# Altium PCB PongBoy.PcbDoc
Units mm, origin at the board's own origin, x right, y up, seen from the top; angles counter-clockwise.
Board outline 100 x 80 mm, 2 copper layers (Top Layer, Bottom Layer), stack 1.57 mm thick; 34 components, 34 nets, 146 pads, 18 vias.
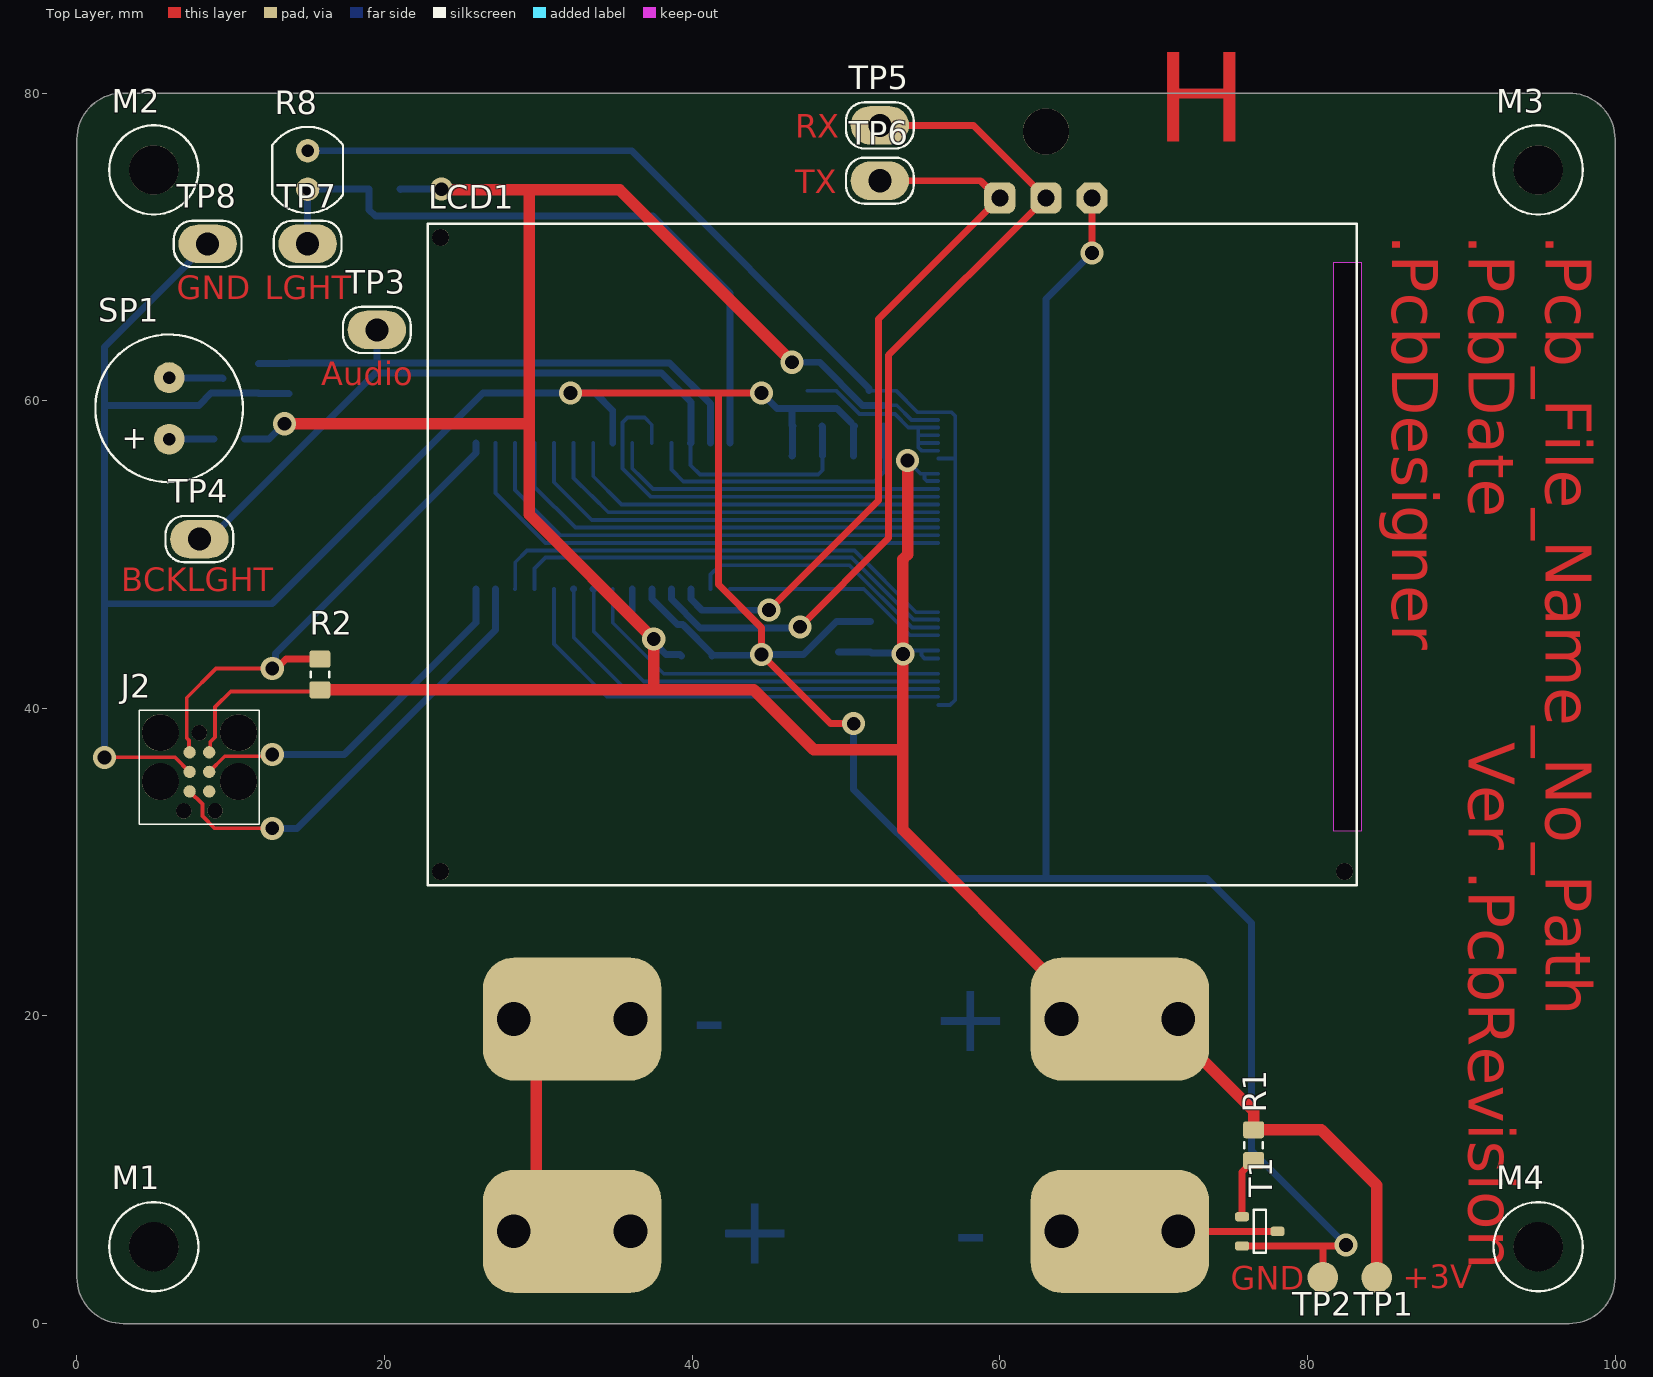
[diagram p0: Top Layer view]
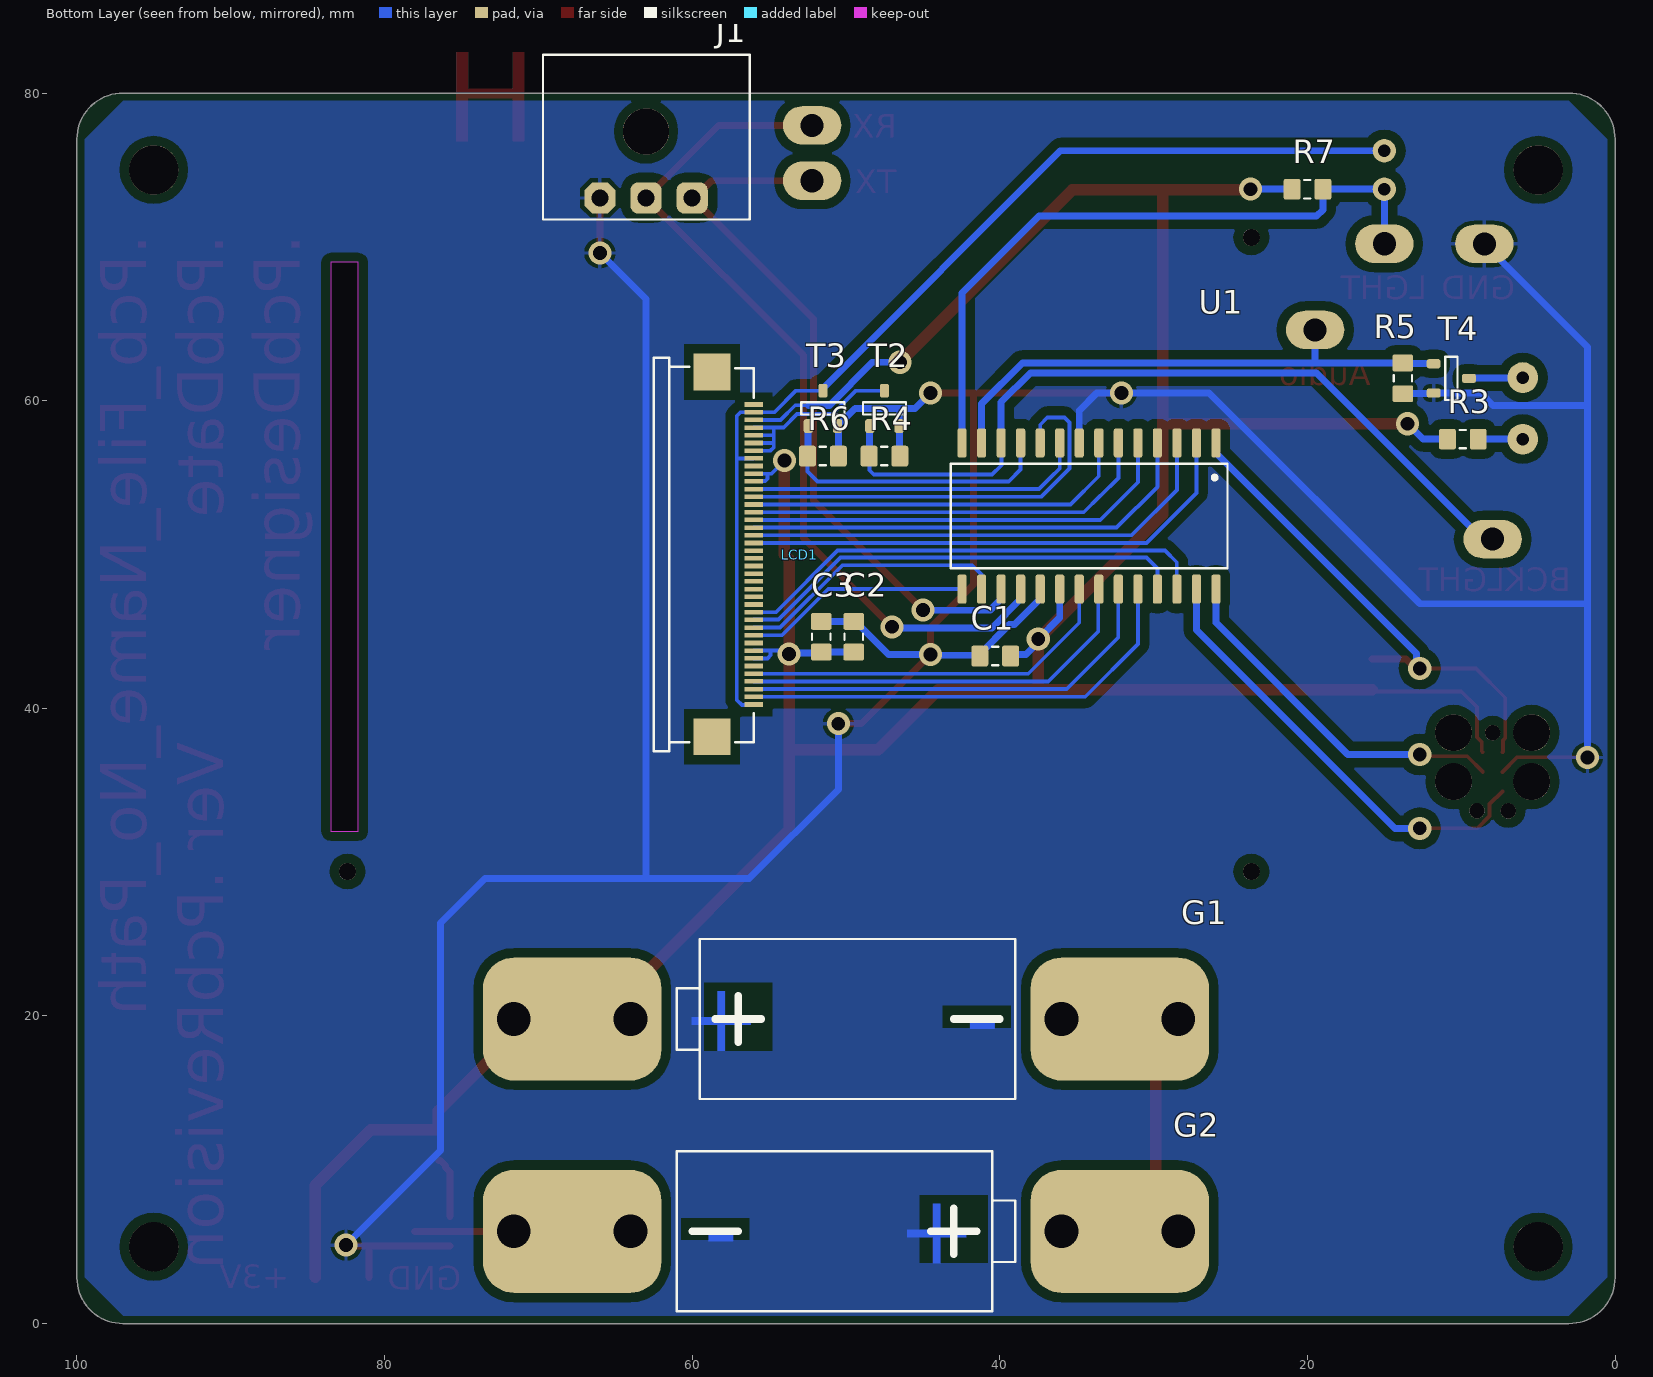
[diagram p1: Bottom Layer view, seen from below]

## Layer stack, top to bottom
Top Layer: signal copper 0.035
Dielectric 1: core 1.5, FR-4, Dk 4.2
Bottom Layer: signal copper 0.035

## Board outline
0,3 0,77 cw(c3,77) 3,80 97,80 cw(c97,77) 100,77 100,2.995 cw(c97.005,2.995) 97.005,0 3,0 cw(c3,3)
cut-out: 81.7,69 83.5,69 83.5,32 81.7,32

## Design rules (kind name [scope] priority, off if disabled: settings)
AcuteAngle [All] p1: minimum=9.00000000000000E+0001 checktracksonly=TRUE
AssemblyTestPointUsage [All] p1 off:
AssemblyTestpoint [All] p1 off: testpointundercomponent=TRUE minsize=1.016 maxsize=2.54 preferedsize=1.524 minholesize=0 maxholesize=1.016 preferedholesize=0.813 testpointgrid=0.025 usegrid=TRUE gridtolerance=0 allowsidetop=TRUE allowsidebottom=TRUE
BoardOutlineClearance [All] p1 off: gap=0.25 ignorepadtopadclearanceinfootprint=FALSE
Clearance [All] p1: gap=0.2 ignorepadtopadclearanceinfootprint=FALSE except(0.6: Arc-Fill Arc-Poly Arc-Region Track-Fill Track-Poly Track-Region SMDPad-Fill SMDPad-Poly SMDPad-Region THPad-Fill THPad-Poly THPad-Region Via-Fill Via-Poly Via-Region Fill-Fill Fill-Poly Fill-Region Poly-Poly Poly-Region Region-Region)
ComponentClearance [All] p1 off: gap=0.25 collisioncheckmode=3 verticalgap=0.25 showdistances=FALSE
DiffPairsRouting [All] p1 off: maxlimit=0.254 minlimit=0.254 mostfreqgap=0.254 toplayer_minwidth=0.381 toplayer_maxwidth=0.381 toplayer_prefwidth=0.381 bottomlayer_minwidth=0.381 bottomlayer_maxwidth=0.381 bottomlayer_prefwidth=0.381 maxuncoupledlength=12.7
FabricationTestPointUsage [All] p1 off: valid=0 allowmultiple=FALSE
FabricationTestpoint [All] p1 off: side=3 testpointundercomponent=TRUE minsize=1.016 maxsize=2.54 preferedsize=1.524 minholesize=0 maxholesize=1.016 preferedholesize=0.813 testpointgrid=0.025 allowsidetop=TRUE allowsidebottom=TRUE usegrid=TRUE gridtolerance=0
FanoutControl Fanout_BGA [IsBGA] p1 off: bgadir=Out bgaviamode=Centered fanoutstyle=Auto fanoutdirection=Alternating viagrid=0.025 // Fanout_BGA (Default Rule)
FanoutControl Fanout_LCC [IsLCC] p2 off: bgadir=Out bgaviamode=Centered fanoutstyle=Auto fanoutdirection=Alternating viagrid=0.025 // Fanout_LCC (Default Rule)
FanoutControl Fanout_SOIC [IsSOIC] p3 off: bgadir=Out bgaviamode=Centered fanoutstyle=Auto fanoutdirection=Alternating viagrid=0.025 // Fanout_SOIC (Default Rule)
FanoutControl Fanout_Small [(CompPinCount < 5)] p4 off: bgadir=Out bgaviamode=Centered fanoutstyle=Auto fanoutdirection=OutThenIn viagrid=0.025 // Fanout_Small (Default Rule)
FanoutControl Fanout_Default [All] p5 off: bgadir=Out bgaviamode=Centered fanoutstyle=Auto fanoutdirection=Alternating viagrid=0.025 // Fanout_Default (Default Rule)
Height [All] p1 off: minheight=0 maxheight=25.4 prefheight=12.7
HoleSize [All] p1 off: absolutevalues=TRUE maxlimit=3 minlimit=0.15 maxpercent=80.000 minpercent=20.000
HoleToHoleClearance [All] p1 off: gap=0.25 allowstackedmicrovias=TRUE
LayerPairs [All] p1 off: enforce=TRUE
MinimumAnnularRing [All] p1 off: minimumring=0.35
MinimumSolderMaskSliver [All] p1 off: minsoldermaskwidth=0
PasteMaskExpansion [All] p1 off: expansion=0
PlaneClearance [All] p1: clearance=0.25
PlaneConnect [All] p1 off: planeconnectstyle=Relief reliefexpansion=0.5 reliefentries=4 reliefconductorwidth=0.25 reliefairgap=0.25
PolygonConnect [All] p1: connectstyle=Relief reliefconductorwidth=0.25 reliefentries=4 polygonreliefangle="90 Angle" airgapwidth=0.25
RoutingCorners [All] p1 off: cornerstyle=45-Degree minsetback=2.5 maxsetback=2.5
RoutingLayers [All] p1 off: top layer_v5=TRUE bottom layer_v5=TRUE
RoutingPriority [All] p1 off: routingpriority=0
RoutingTopology [All] p1 off: topology=Shortest
RoutingVias [All] p1: holewidth=0.9 width=1.5 viastyle="Through Hole" minholewidth=0.9 minwidth=1.5 maxholewidth=0.9 maxwidth=1.5
SilkToBoardRegionClearance [All] p1 off:
SilkToSilkClearance [All] p1 off: silktosilkclearance=0
SilkToSolderMaskClearance [IsPad] p1 off: minsilkscreentomaskgap=0 clearancetoexposedcopper=TRUE
SolderMaskExpansion [All] p1 off: expansion=0
Width [All] p1: maxlimit=4 minlimit=0.25 preferedwidth=0.45
4 further rules are at their usual default settings.

## Components (designator, comment, footprint, x,y, rotation, side; value= is the part's Value field where it differs from the comment)
C1 "100n" "CAPACITOR 2012 REFLOW" 40.3,43.4 r180 bottom
C2 "100n" "CAPACITOR 2012 REFLOW" 49.5,44.65 r270 bottom
C3 "100n" "CAPACITOR 2012 REFLOW" 51.604,44.65 r270 bottom
G1 "AAA Battery Holder" "1.5V Cell AAA/LR03" 50,19.8 r180 bottom
G2 "AAA Battery Holder" "1.5V Cell AAA/LR03" 50,6 r0 bottom locked
J1 "MOLEX 43650-0300" "MOLEX 43650-0300" 63,73.18 r0 bottom
J2 "TAG CONNECT TC2030-MCP-FP" "TAG CONNECT TC2030-MCP-FP" 7.965,35.87 r270 top
LCD1 "LCD-NHD-2.4-240320SF" LCD-NHD-2.4-240320SF 56,50 r90 top locked
M1 "M3x20" "Screw Hex Socket M3X5 Unconnected" 5,5 r0 top locked
M2 "M3x20" "Screw Hex Socket M3X5 Unconnected" 5,75 r0 top locked
M3 "M3x20" "Screw Hex Socket M3X5 Unconnected" 95,75 r0 top locked
M4 "M3x20" "Screw Hex Socket M3X5 Unconnected" 95,5 r0 top locked
R1 "10k" "RESISTOR 2012 REFLOW" 76.5,11.6 r90 top
R2 "10k" "RESISTOR 2012 REFLOW" 15.8,42.2 r270 top
R3 "100" "RESISTOR 2012 REFLOW" 9.9,57.5 r0 bottom
R4 "10k" "RESISTOR 2012 REFLOW" 47.5,56.396 r0 bottom
R5 "10k" "RESISTOR 2012 REFLOW" 13.8,61.45 r90 bottom
R6 "10k" "RESISTOR 2012 REFLOW" 51.5,56.396 r0 bottom
R7 "TBD" "RESISTOR 2012 REFLOW" 20,73.75 r0 bottom
R8 "*" "LDR VT900" 15,75 r90 top
SP1 "PUI Audio AT-0927-TT-3-R" "Speaker PUI Audio AT-0927-TT-3-R" 6,59.5 r180 top
T1 "PMV13XNEAR" "SOT23 P0.95 C1.6x3.0 H1.3" 76.9,6 r0 top
T2 "PMV13XNEAR" "SOT23 P0.95 C1.6x3.0 H1.3" 47.5,59.5 r90 bottom
T3 "PMV13XNEAR" "SOT23 P0.95 C1.6x3.0 H1.3" 51.5,59.5 r90 bottom
T4 "PMV13XNEAR" "SOT23 P0.95 C1.6x3.0 H1.3" 10.65,61.45 r180 bottom
TP1 "*" "Pad D2.0" 84.5,3 r0 top
TP2 "*" "Pad D2.0" 81,3 r90 top
TP3 "*" "Test Point Vogt 1016L.68M" 19.5,64.6 r0 top
TP4 "*" "Test Point Vogt 1016L.68M" 7.965,51 r0 top
TP5 "*" "Test Point Vogt 1016L.68M" 52.2,77.9 r0 top
TP6 "*" "Test Point Vogt 1016L.68M" 52.2,74.3 r180 top
TP7 "*" "Test Point Vogt 1016L.68M" 15,70.2 r0 top
TP8 "*" "Test Point Vogt 1016L.68M" 8.5,70.196 r0 top
U1 "PIC18LF25K22I/SO" "SO28 P1.27 C7.5X17.9 H2.7" 34.2,52.5 r270 bottom

## Footprints (in the part's own frame and the unit in brackets; to place one, negate y for a bottom-side part, rotate by r counter-clockwise, add the part's x,y. Pads: shape width x height; smd on the part's side, far side on the other; paste and mask are expansions set on the pad)
"1.5V Cell AAA/LR03" [mm] "Battery Cell D10.5 L44.5"
  rrect50% 8x8 hole 2.2 copper offset 2,0: 1(-21.6,0) 2(14,0)
  rrect50% 8x8 hole 2.2 copper offset -2,0: 1(-14,0) 2(21.6,0)
  silkscreen extent -11,-5.2 11,5.2, body extent -24,-5.4 24,5.4, height 13.5
"CAPACITOR 2012 REFLOW" [mm] "Capacitor SMD 2.0x1.2mm (0805-imperial)"
  rrect25% 1.1x1.35 smd: 1(-1,0) 2(1,0)
  silkscreen extent -0.2,-0.6 0.2,0.6, body extent -1,-0.6 1,0.6, height 1
LCD-NHD-2.4-240320SF [mm] "LCD-NHD-2.4-240320SF"
  round 1.1 hole 1.1 paste-25.4 mask-25.4: 0(-20.61,32.35) 0(-20.61,-26.41) 0(20.61,32.35)
  rect 2.4x2.4 smd far side: 0(-11.85,-2.7) 0(11.86,-2.7)
  rect 0.3x1.2 smd far side: 1(-9.75,0) 2(-9.25,0) 3(-8.75,0) 4(-8.25,0) 5(-7.75,0) 6(-7.25,0) 7(-6.75,0) 8(-6.25,0) 9(-5.75,0) 10(-5.25,0) 11(-4.75,0) 12(-4.25,0) 13(-3.75,0) 14(-3.25,0) 15(-2.75,0) 16(-2.25,0) 17(-1.75,0) 18(-1.25,0) 19(-0.75,0) 20(-0.25,0) 21(0.25,0) 22(0.75,0) 23(1.25,0) 24(1.75,0) 25(2.25,0) 26(2.75,0) 27(3.25,0) 28(3.75,0) 29(4.25,0) 30(4.75,0) 31(5.25,0) 32(5.75,0) 33(6.25,0) 34(6.75,0) 35(7.25,0) 36(7.75,0) 37(8.25,0) 38(8.75,0) 39(9.25,0) 40(9.75,0)
  silkscreen extent -21.5,-27.2 21.5,33.2, body extent -21.43,-27.17 21.43,33.18, height 3.87
"LDR VT900" [mm] "Light Dependent Resistor VT900 Series"
  round 1.524 hole 0.8: 1(-1.25,0) 2(1.25,0)
  silkscreen extent -2.8,-2.3 2.8,2.3, body extent -2.51,-2.02 2.52,2, height 2.3
"MOLEX 43650-0300" [mm] "Micro-Fit 3.0 Right Angle Header, 3.00mm Pitch, Single Row, 3 Circuits"
  round 3 hole 3 paste-25.4 mask-25.4: 0(0,-4.32)
  oct 2.032x2.032 hole 1.1: 1(3,0)
  rrect50% 2.032x2.032 hole 1.1: 2(0,0) 3(-3,0)
  silkscreen extent -6.75,-9.3 6.7,1.4, body extent -6.33,-8.9 6.32,1, height 5.58
"Pad D2.0" [mm] "Test Point simple pad diameter 2.0, no hole"
  round 2 smd: 1(0,0)
"RESISTOR 2012 REFLOW" [mm] "Resistor SMD 2.0x1.2mm (0805-imperial)"
  rrect25% 1.1x1.35 smd: 1(-1,0) 2(1,0)
  silkscreen extent -0.2,-0.6 0.2,0.6, body extent -1,-0.62 1,0.63, height 0.45
"Screw Hex Socket M3X5 Unconnected" [mm] "Screw Hex Socket M3X5 Unconnected BN610"
  round 3.2 hole 3.2 unplated paste+0 mask+0: 0(0,0)
  silkscreen extent -2.9,-2.9 2.9,2.9, body extent -2.75,-2.75 2.75,2.75, height 3.01
"SO28 P1.27 C7.5X17.9 H2.7" [mm] "SOIC, 28-Leads, Body 17.9x7.50mm, Pitch 1.27mm, IPC Medium Density"
  rrect50% 1.9x0.6 smd: 1(-4.75,8.255) 2(-4.75,6.985) 3(-4.75,5.715) 4(-4.75,4.445) 5(-4.75,3.175) 6(-4.75,1.905) 7(-4.75,0.635) 8(-4.75,-0.635) 9(-4.75,-1.905) 10(-4.75,-3.175) 11(-4.75,-4.445) 12(-4.75,-5.715) 13(-4.75,-6.985) 14(-4.75,-8.255) 15(4.75,-8.255) 16(4.75,-6.985) 17(4.75,-5.715) 18(4.75,-4.445) 19(4.75,-3.175) 20(4.75,-1.905) 21(4.75,-0.635) 22(4.75,0.635) 23(4.75,1.905) 24(4.75,3.175) 25(4.75,4.445) 26(4.75,5.715) 27(4.75,6.985) 28(4.75,8.255)
  silkscreen extent -3.4,-9 3.4,9, body extent -12.4,-8.96 5.16,8.97, height 2.48
"SOT23 P0.95 C1.6x3.0 H1.3" [mm] "SOT23, 3-Leads, Body 1.6x3.0mm, Pitch 0.95mm, IPC Medium Density"
  rrect50% 0.9x0.6 smd: 1(-1.15,0.95) 2(-1.15,-0.95) 3(1.15,0)
  silkscreen extent -0.4,-1.4 0.4,1.4, body extent -0.8,-1.5 0.8,1.5, height 1.3
"Speaker PUI Audio AT-0927-TT-3-R" [mm] "Speaker PUI Audio AT-0927-TT-3-R D9.0 H4.2"
  round 2 hole 0.8: 1(0,2) 2(0,-2)
  silkscreen extent -4.8,-4.8 4.8,4.8, body extent -4.5,-4.5 4.5,4.5, height 4.2
"TAG CONNECT TC2030-MCP-FP" [mm] "TAG CONNECT TC2030-MCP-FP"
  round 2.4 hole 2.4 unplated paste-1.27: 0(-2.54,2.54) 0(-2.54,-2.54) 0(0.635,2.54) 0(0.635,-2.54)
  round 1 hole 1 unplated paste-1.27: 0(-2.54,0) 0(2.54,1.016) 0(2.54,-1.016)
  round 0.8 smd paste-1.27: 1(-1.27,-0.635) 2(-1.27,0.635) 3(0,-0.635) 4(0,0.635) 5(1.27,-0.635) 6(1.27,0.635)
  silkscreen extent -4,-3.9 3.4,3.9
"Test Point Vogt 1016L.68M" [mm] "Test Point Vogt 1016L.68M"
  oval 3.8x2.5 hole 1.5: 1(0,0)
  silkscreen extent -2.2,-1.5 2.2,1.5, body extent -1.75,-0.31 1.75,0.31, height 6

## Part data
C1 C2 C3: library part Capacitor, "Capacitor"
G1 G2: library part Battery, "Battery Generic"
J1: "Micro-Fit 3.0 Right-Angle Header, 3.00mm Pitch, Single Row, 3 Circuits"
LCD1: "NEWHEAVEN LCD"
M1 M2 M3 M4: library part "Screw Hex Socket Unconnected", "Screw Hex Socket Unconnected BN610"
R1 R2 R3 R4 R5 R6 R7: library part Resistor, "Resistor"
R8: library part LDR, "Light Dependent Resistor"
SP1: library part "Speaker PUI Audio AT-0927-TT-3-R", "Speaker PUI Audio AT-0927-TT-3-R"
T1 T2 T3 T4: library part "MOS-N SOT23 G-S-D", "Generic MOS-N"
TP1 TP2: library part Pad, "Pad"
TP3 TP4 TP5 TP6 TP7 TP8: library part "Test Point", "Test Point"
U1: library part PIC18F2_K22-_/SO, "Flash Microcontrollers  with 10-Bit A/D and nanoWatt Technology"

## Via types
v1: diameter 1.5, hole 0.9, Top Layer to Bottom Layer, 18 vias

## Nets (pads, with @x,y where several pads share a name; then routed paths per layer and width w, separated by ;. In a path a pad name is that pad's centre, name@x,y a point inside that pad or via, vN(x,y) a via of type N, cw(c..) or ccw(c..) an arc to the next point about the centre after c; other vN are vias at no path point)
+3V: C1.2 C2.2 C3.2 G1.1 J2.2 LCD1.7 LCD1.8 LCD1.30 LCD1.31 LCD1.38 R1.2 R2.2 R3.2 R7.2 TP1.1 U1.20 | length 229.3
  Top Layer w0.25: J2.2 8.667,37.207 8.667,37.804 8.98,38.117 8.98,40.08 10,41.1 15.7,41.1 R2.2
  Top Layer w0.45: 29.359,58.5 29.4,58.541
  Top Layer w0.75: v1(13.5,58.5) 29.359,58.5 ; R2.2 37.5,41.2 ; v1(23.7,73.75) 23.75,73.7 29.4,73.7 ; v1(46.5,62.5) 35.3,73.7 29.4,73.7 ; v1(54,56.1) 54,50 53.7,49.7 v1(53.7,43.525) 53.7,37.3 ; G1.1@64,19.8 64,21.8 53.7,32.1 53.7,37.3 ; G1.1@71.6,19.8 71.6,18.725 76.5,13.825 R1.2 80.9,12.6 81,12.5 84.5,9 TP1.1 ; 29.4,73.7 29.4,58.541 29.4,52.6 v1(37.5,44.5) 37.5,41.2 ; 37.5,41.2 44,41.2 47.9,37.3 53.7,37.3
  Bottom Layer w0.25: 52.45,59.7 53.3,59.7 54.25,58.75 LCD1.38 ; v1(53.7,43.525) 53.925,43.75 54.9,43.75 ; v1(54,56.1) 54.85,55.25 55.1,55.25 ; LCD1.7 55.1,43.25 54.9,43.45 54.9,43.75 ; LCD1.8 54.9,43.75 ; LCD1.30@56,54.781 55.246,54.781 55.1,54.928 55.1,55.25 ; LCD1.31 55.1,55.25
  Bottom Layer w0.45: R3.2 12.485,57.5 13.485,58.5 v1(13.5,58.5) ; R7.2@21.025,73.725 R7.2 v1(23.7,73.75) ; U1.20 36.105,45.895 v1(37.5,44.5) 37.5,44.3 38.3,43.5 39.2,43.5 C1.2 ; v1(46.5,62.5) 48.278,62.5 51.078,59.7 52.45,59.7 ; C2.2 C3.2 51.667,43.587 53.638,43.587 v1(53.7,43.525)
GND: C1.1 C2.1 C3.1 J1.1 J2.3 R4.1 R5.1 R6.1 T1.2 T2.2 T3.2 T4.2 TP2.1 TP8.1 U1.8 U1.19 | length 275
  Top Layer w0.25: v1(1.8,36.8) 1.822,36.823 6.377,36.823 J2.3
  Top Layer w0.45: v1(32.1,60.5) 41.7,60.5 ; v1(44.5,60.5) 41.7,60.5 ; v1(50.5,39) 49,39 v1(44.5,43.5) 44.5,45.238 41.7,48.038 41.7,60.5 ; v1(66,69.6) J1.1 ; T1.2 80.95,5.05 ; TP2.1 81,5 80.95,5.05 ; v1(82.5,5.1) 82.45,5.05 80.95,5.05
  Bottom Layer w0.45: v1(1.8,36.8) 1.8,46.9 ; TP8.1 8.405,70.196 7.458,69.249 7.458,69.153 1.8,63.496 1.8,59.7 ; R5.1 13.775,60.475 11.825,60.475 T4.2 8.725,60.5 7.925,59.7 1.8,59.7 ; U1.8 34.835,59.365 33.7,60.5 v1(32.1,60.5) 26.4,60.5 12.7,46.8 1.9,46.8 1.8,46.9 ; U1.19 37.375,47.1 39.037,45.438 39.387,45.438 41.3,43.525 C1.1 41.35,43.45 44.45,43.45 v1(44.5,43.5) 47.225,43.5 49.375,45.65 C2.1 C3.1 ; v1(44.5,60.5) 44.515,60.5 45.515,59.5 46.5,59.5 ; R4.1 46.525,56.421 46.525,58.325 T2.2 46.5,58.4 46.5,59.5 ; T3.2@50.325,58.575 49.4,59.5 46.5,59.5 ; v1(50.5,39) 50.5,34.719 56.292,28.927 63,28.927 ; R6.1 50.5,58.3 T3.2 ; v1(66,69.6) 63,66.6 63,28.927 ; v1(82.5,5.1) 76.35,11.25 76.35,26.05 73.473,28.927 63,28.927 ; 1.8,46.9 1.8,59.7
LCD_GND: LCD1.1 LCD1.33 LCD1.39 R8.2 T3.3 | length 70.1
  Bottom Layer w0.25: T3.3 53.25,60.65 54.65,59.25 LCD1.39 56.85,59.25 57.1,59 57.1,56.3 ; LCD1.1@56,40.219 56.769,40.219 57.1,40.55 57.1,56.3 ; LCD1.33 57.05,56.25 57.1,56.3
  Bottom Layer w0.45: R8.2 36.05,76.25 51.5,60.8 T3.3
NetG1_2: G1.2 G2.1 | length 15
  Top Layer w0.75: G2.1@28.4,6 29.857,7.457 29.857,18.343 G1.2@28.4,19.8
NetG2_2: G2.2 T1.3 | length 6.5
  Top Layer w0.45: G2.2@71.6,6 T1.3
NetJ1_2: J1.2 TP5.1 U1.18 | length 57.1
  Top Layer w0.45: v1(47,45.3) 52.776,51.076 52.776,62.956 J1.2 58.28,77.9 TP5.1
  Bottom Layer w0.45: U1.18 38.645,47.1 40.52,45.225 46.925,45.225 v1(47,45.3)
NetJ1_3: J1.3 TP6.1 U1.17 | length 47.1
  Top Layer w0.45: v1(45,46.4) 52.1,53.5 52.1,65.3 59.847,73.047 59.847,73.18 58.727,74.3 TP6.1
  Bottom Layer w0.45: U1.17 39.915,47.1 40.64,46.375 44.975,46.375 v1(45,46.4)
NetJ2_1: J2.1 R2.1 U1.1 | length 33.5
  Top Layer w0.25: J2.1 7.293,37.177 7.293,37.915 7.14,38.068 7.14,40.69 9.05,42.6 v1(12.7,42.6)
  Top Layer w0.45: v1(12.7,42.6) 12.984,42.6 13.584,43.2 R2.1
  Bottom Layer w0.45: v1(12.7,42.6) 12.901,42.801 12.901,43.556 25.945,56.6 U1.1
NetJ2_4: J2.4 U1.28 | length 23.5
  Top Layer w0.25: J2.4 9.615,36.885 12.585,36.885 v1(12.7,37)
  Bottom Layer w0.45: v1(12.7,37) 17.38,37 25.945,45.565 U1.28
NetJ2_5: J2.5 U1.27 | length 29.3
  Top Layer w0.25: J2.5 8.156,33.774 8.156,32.988 8.944,32.2 v1(12.7,32.2)
  Bottom Layer w0.45: v1(12.7,32.2) 14.315,32.2 27.215,45.1 U1.27
NetLCD1_2: LCD1.2 U1.24 | length 30
  Bottom Layer w0.25: U1.24 31.025,44.175 34.45,40.75 LCD1.2
NetLCD1_3: LCD1.3 U1.23 | length 28.2
  Bottom Layer w0.25: U1.23@32.3,47.745 32.3,44.6 35.65,41.25 LCD1.3
  Bottom Layer w0.45: U1.23 U1.23@32.3,47.745
NetLCD1_4: LCD1.4 U1.22 | length 26.5
  Bottom Layer w0.25: U1.22@33.6,47.715 33.6,45 36.85,41.75 ; 36.9,41.75 LCD1.4
  Bottom Layer w0.45: U1.22 U1.22@33.6,47.715
NetLCD1_5: LCD1.5 U1.21 | length 24.7
  Bottom Layer w0.25: U1.21 34.835,45.565 38.15,42.25 LCD1.5
NetLCD1_10: LCD1.10 U1.15 | length 14.8
  Bottom Layer w0.25: U1.15 51.15,47.75 54.15,44.75 LCD1.10
NetLCD1_11: LCD1.11 U1.16 | length 17.7
  Bottom Layer w0.25: U1.16 41.2,47.765 41.2,48.7 41.8,49.3 50.236,49.3 54.286,45.25 LCD1.11
NetLCD1_12: LCD1.12 U1.25 | length 29.6
  Bottom Layer w0.25: U1.25 29.755,49.1 30.455,49.8 50.373,49.8 50.423,49.75 54.398,45.775 55.975,45.775 LCD1.12
NetLCD1_13: LCD1.13 U1.26 | length 31.2
  Bottom Layer w0.25: U1.26 28.5,47.765 28.5,49.5 29.25,50.25 50.559,50.25 54.559,46.25 LCD1.13
NetLCD1_22: LCD1.22 U1.2 | length 33.4
  Bottom Layer w0.25: U1.2 27.215,54 30.465,50.75 LCD1.22
NetLCD1_23: LCD1.23 U1.3 | length 31.8
  Bottom Layer w0.25: U1.3 28.485,54.2 31.435,51.25 32.2,51.25 LCD1.23
NetLCD1_24: LCD1.24 U1.4 | length 30.2
  Bottom Layer w0.25: U1.4 29.755,54.4 32.405,51.75 LCD1.24
NetLCD1_25: LCD1.25 U1.5 | length 28.5
  Bottom Layer w0.25: U1.5 31.025,54.7 33.475,52.25 LCD1.25
NetLCD1_26: LCD1.26 U1.6 | length 26.9
  Bottom Layer w0.25: U1.6 32.295,54.98 33.475,53.8 33.495,53.8 34.545,52.75 LCD1.26
NetLCD1_27: LCD1.27 U1.7 | length 25.4
  Bottom Layer w0.25: U1.7 33.565,55.085 35.4,53.25 LCD1.27
NetLCD1_28: LCD1.28 U1.10 | length 27.7
  Bottom Layer w0.25: U1.10 37.375,58.439 36.914,58.9 35.8,58.9 35.48,58.58 35.48,55.584 37.314,53.75 LCD1.28
NetLCD1_29: LCD1.29 U1.9 | length 22.1
  Bottom Layer w0.25: U1.9 36.105,55.595 36.7,55 37.45,54.25 LCD1.29
NetLCD1_34: LCD1.34 LCD1.35 LCD1.36 LCD1.37 T2.3 | length 14.9
  Bottom Layer w0.25: T2.3 49.35,60.65 50.875,59.125 53.175,59.125 54.05,58.25 54.7,58.25 ; LCD1.34 54.9,56.75 54.7,56.95 54.7,57.25 ; LCD1.35 54.75,57.25 ; LCD1.36 54.75,57.75 54.7,57.7 ; LCD1.37 54.7,58.25 ; 54.7,57.25 54.75,57.25 ; 54.7,57.25 54.7,57.3 ; 54.7,57.3 54.75,57.25 ; 54.7,57.3 54.7,57.7 ; 54.7,57.7 54.7,58.25
NetR1_1: R1.1 T1.1 | length 4
  Top Layer w0.45: T1.1 75.75,9.85 76.05,10.15 76.05,10.275 76.375,10.6 R1.1
NetR3_1: R3.1 SP1.1 | length 2.9
  Bottom Layer w0.45: SP1.1 R3.1
NetR4_2: R4.2 T2.1 TP4.1 U1.12 | length 53.1
  Bottom Layer w0.25: U1.12@39.9,57.235 39.9,55.8 40.5,55.2 48.2,55.2 48.475,55.475 R4.2@48.475,56.421
  Bottom Layer w0.45: TP4.1 8.615,51 19.415,61.8 38.015,61.8 39.915,59.9 U1.12 U1.12@39.9,57.235 ; T2.1 48.475,58.325 R4.2@48.475,56.421
NetR5_2: R5.2 T4.1 TP3.1 U1.13 | length 35.2
  Bottom Layer w0.45: T4.1 11.825,62.425 13.775,62.425 R5.2 19.5,62.45 ; TP3.1 19.5,62.45 ; U1.13 41.185,59.8 38.535,62.45 19.5,62.45
NetR6_2: R6.2 T3.1 U1.11 | length 19.1
  Bottom Layer w0.25: U1.11 38.645,55.529 39.424,54.75 51.85,54.75 52.5,55.4 R6.2 R6.2@52.475,56.421
  Bottom Layer w0.45: T3.1 52.475,58.325 R6.2@52.475,56.421
NetR7_1: R7.1 R8.1 TP7.1 U1.14 | length 44.3
  Bottom Layer w0.45: TP7.1 R8.1 R7.1 19,72.4 19.4,72 22.5,72 37.45,72 42.455,66.995 U1.14
NetSP1_2: SP1.2 T4.3 | length 3.5
  Bottom Layer w0.45: SP1.2 6.025,61.475 9.475,61.475 T4.3
pads on no net: J1.0 J2.0 J2.6 LCD1.0 LCD1.6 LCD1.9 LCD1.14 LCD1.15 LCD1.16 LCD1.17 LCD1.18 LCD1.19 LCD1.20 LCD1.21 LCD1.32 LCD1.40 M1.0 M2.0 M3.0 M4.0

## Polygon pours and split planes (outlines as drawn)
GND on Bottom Layer (solid, remove dead copper, pour order 16): 0.5,77 3,79.5 97,79.5 99.5,77 99.5,3 97,0.5 3,0.5 0.5,3

## Other copper
Top Layer:
  text "RX" at 46.7,77.1 h1.52
  text "H" at 70.1,74.9 h10
  text "TX" at 46.7,73.5 h1.52
  text ".PcbDesigner" at 85.5,70.8 h3 r270
  text ".PcbDate" at 90.5,70.8 h3 r270
  text ".Pcb_File_Name_No_Path" at 95.5,70.8 h3 r270
  text "GND" at 6.5,66.6 h1.52
  text "LGHT" at 12.2,66.6 h1.52
  text "Audio" at 15.9,61 h1.52
  text "BCKLGHT" at 2.9,47.6 h1.52
  text "Ver .PcbRevision" at 90.5,37.8 h3 r270
  text "+3V" at 86.2,2.3 h1.52
  text "GND" at 75,2.2 h1.52
Bottom Layer:
  text "-" at 40,17.7 h4.5
  text "+" at 55.5,17.7 h4.5
  text "+" at 41.5,3.9 h4.5
  text "-" at 57,3.9 h4.5

## Silkscreen, mask and mechanical layers (free items; w line width, h text height)
Mechanical 1:
  lines w0.15: 0,3 ccw(c3,3) 3,0 97.005,0 ccw(c97.005,2.995) 100,2.995 100,77 ccw(c97,77) 97,80 3,80 ccw(c3,77) 0,77 0,3
  lines w0.254: 81.7,32 81.7,69 83.5,69 83.5,32 81.7,32
Drill Drawing:
  circle w0.254: c110.43,55.637 r0.847
  lines w0.254: 109.583,25.157 110.43,24.31 111.277,25.157 110.43,26.003 109.583,25.157 ; 109.583,28.12 110.43,28.543 111.277,28.12 110.853,28.967 111.277,29.813 110.43,29.39 109.583,29.813 110.007,28.967 109.583,28.12 ; 109.583,32.353 110.007,32.353 110.007,31.93 110.853,31.93 110.853,32.353 111.277,32.353 111.277,33.2 110.853,33.2 110.853,33.623 110.007,33.623 110.007,33.2 109.583,33.2 109.583,32.353 ; 109.583,35.74 111.277,35.74 111.277,37.433 109.583,37.433 109.583,35.74 ; 109.583,41.243 111.277,41.243 110.43,39.55 109.583,41.243 ; 109.583,43.783 110.007,43.783 110.43,43.36 110.853,43.783 111.277,43.783 110.853,44.207 111.277,44.63 110.853,44.63 110.43,45.053 110.007,44.63 109.583,44.63 110.007,44.207 109.583,43.783 ; 109.583,47.17 109.583,47.593 110.007,48.017 109.583,48.44 109.583,48.863 110.007,48.863 110.43,48.44 110.853,48.863 111.277,48.863 111.277,48.44 110.853,48.017 111.277,47.593 111.277,47.17 110.853,47.17 110.43,47.593 110.007,47.17 109.583,47.17 ; 109.583,50.98 111.277,50.98 111.277,52.673 109.583,52.673 109.583,50.98 ; 109.922,51.319 110.938,51.319 110.938,52.335 109.922,52.335 109.922,51.319
  lines w0.381: 108.065,23.167 155.246,23.167 ; 108.065,57.457 155.246,57.457 ; 122.057,19.357 122.057,61.267 ; 135.769,19.357 135.769,61.267 ; 108.065,19.357 155.246,19.357 155.246,61.267 108.065,61.267 108.065,19.357
  text "Symbol" at 110.351,58.6 h1.83
  text "Count" at 123.2,58.6 h1.83
  text "Hole Size" at 136.912,58.6 h1.83
  text "4" at 123.2,54.79 h1.52
  text "0.800mm" at 136.912,54.79 h1.52
  text "18" at 123.2,50.98 h1.52
  text "0.900mm" at 136.912,50.98 h1.52
  text "3" at 123.2,47.17 h1.52
  text "1.000mm" at 136.912,47.17 h1.52
  text "6" at 123.2,43.36 h1.52
  text "1.100mm" at 136.912,43.36 h1.52
  text "6" at 123.2,39.55 h1.52
  text "1.500mm" at 136.912,39.55 h1.52
  text "8" at 123.2,35.74 h1.52
  text "2.200mm" at 136.912,35.74 h1.52
  text "4" at 123.2,31.93 h1.52
  text "2.400mm" at 136.912,31.93 h1.52
  text "1" at 123.2,28.12 h1.52
  text "3.000mm" at 136.912,28.12 h1.52
  text "4" at 123.2,24.31 h1.52
  text "3.200mm" at 136.912,24.31 h1.52
  text "54 Total" at 123.2,20.5 h1.52

## Text inside footprints (layer, text, board x,y; h text height)
SP1: Drill Drawing "+" at 4.2,58.1 h1.44 r180; Top Overlay "+" at 4.59,58.136 h1.44 r180